# Altium PCB power.PcbDoc
Units mm, origin at the board's own origin, x right, y up, seen from the top; angles counter-clockwise.
Board outline 1081.53 x 626.49 mm, 2 copper layers (Top Layer, Bottom Layer); 53 components, 47 nets, 167 pads, 22 vias.
Unrouted connection lines stored in the file: 13.
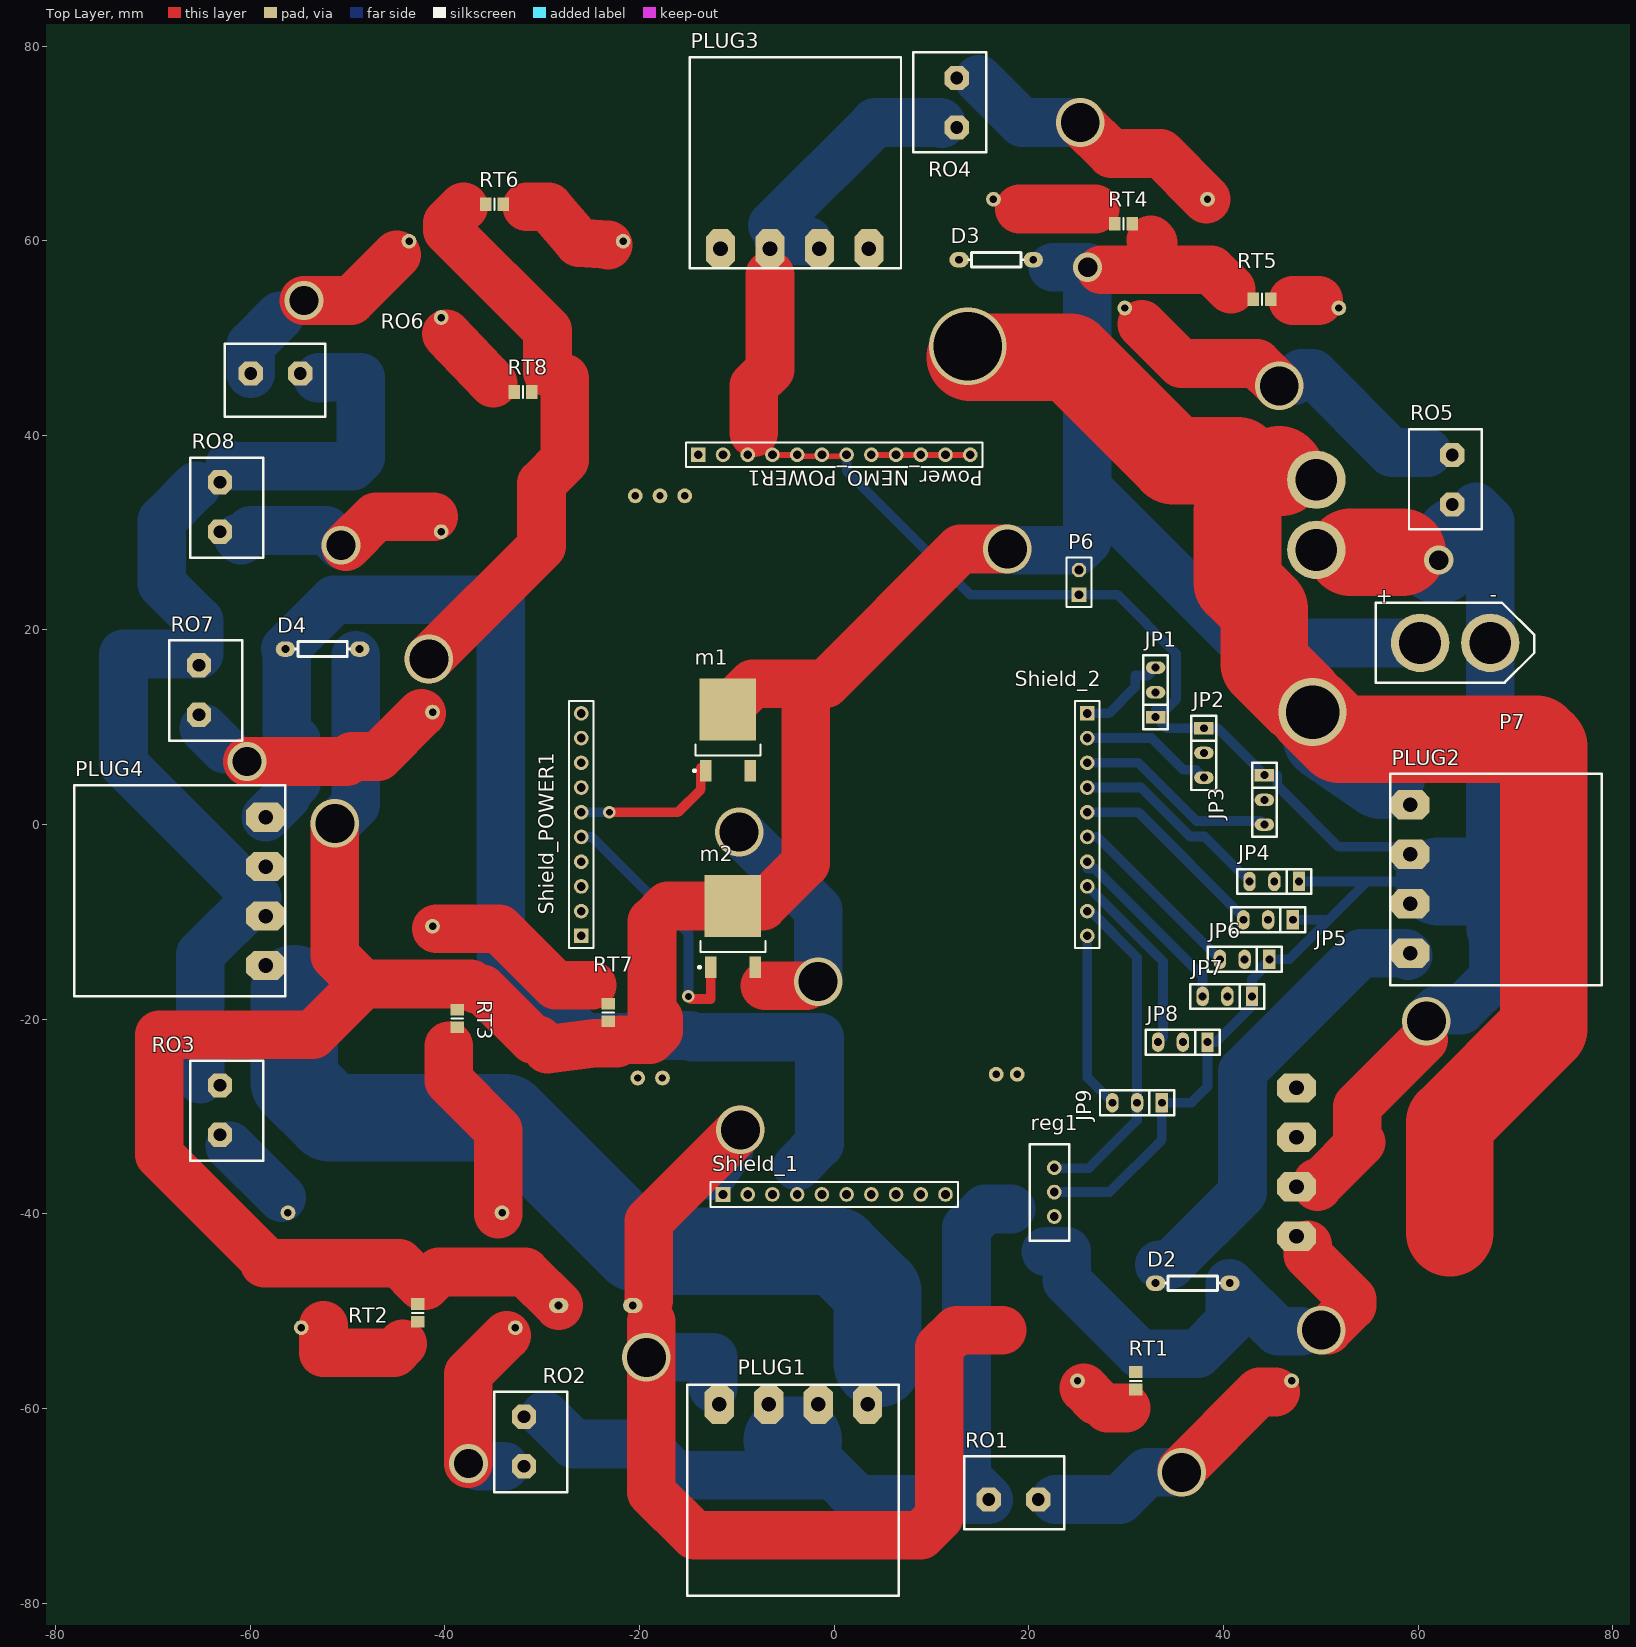
[diagram p0: Top Layer view]
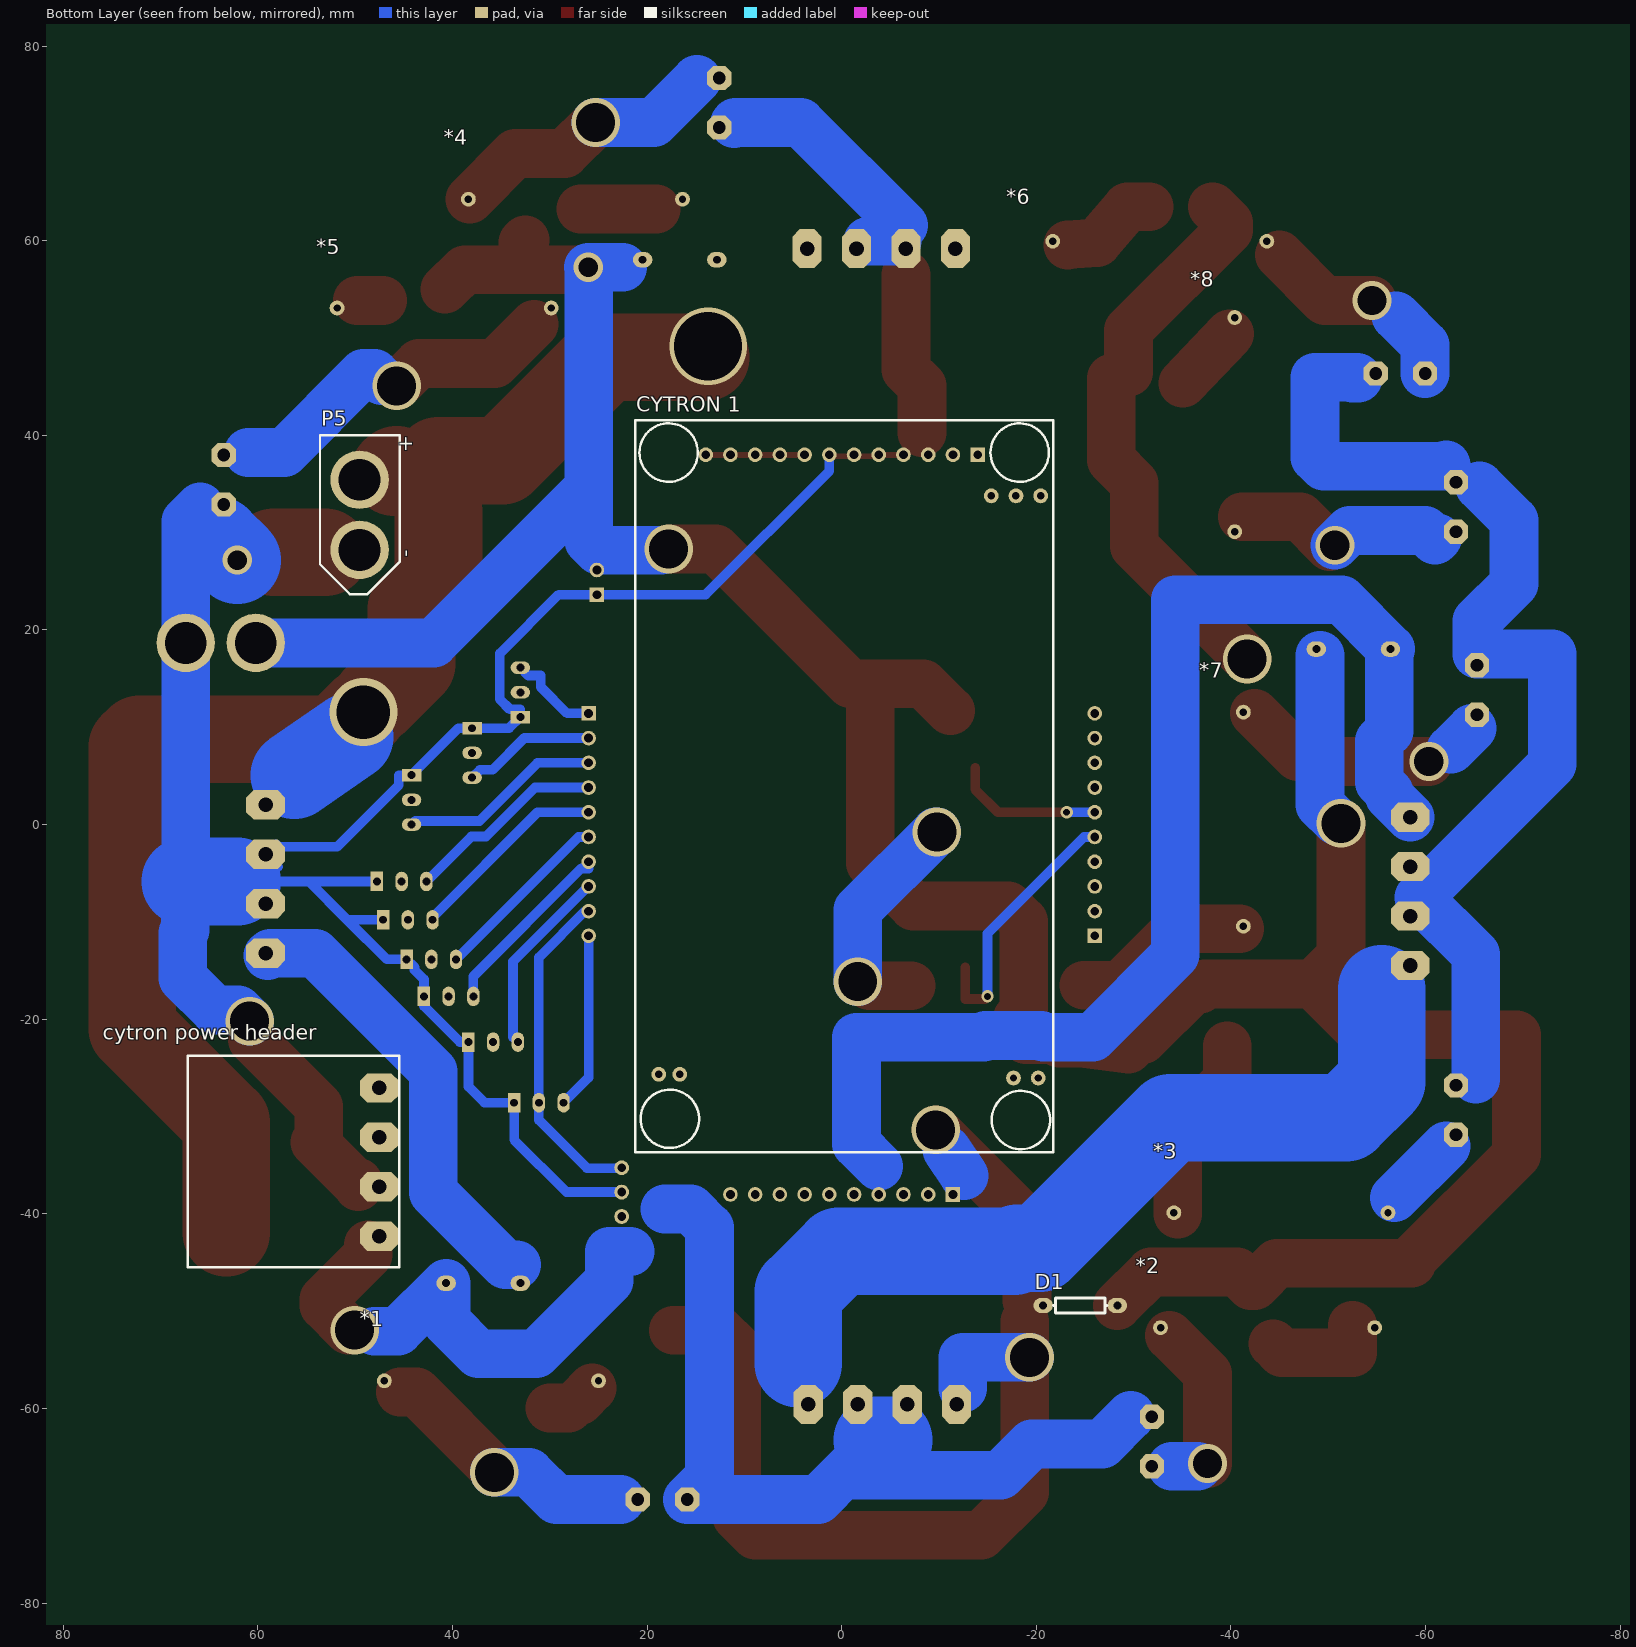
[diagram p1: Bottom Layer view, seen from below]

## Layer stack, top to bottom
Top Solder: solder mask 0.0102, Solder Resist, Dk 3.5
Top Layer: signal copper 0.0356
Dielectric 1: dielectric 0.32, FR-4, Dk 4.8
Bottom Layer: signal copper 0.0356
Bottom Solder: solder mask 0.0102, Solder Resist, Dk 3.5

## Board outline
526.415,336.042 524.129,338.328 -549.91,338.328 -549.91,-288.163 -546.862,-285.115 531.622,-285.115

## Design rules (kind name [scope] priority, off if disabled: settings)
Clearance [All] p1: gap=0.6 ignorepadtopadclearanceinfootprint=TRUE
PolygonConnect [All] p1: connectstyle=Relief reliefconductorwidth=0.254 reliefentries=4 polygonreliefangle="90 Angle" airgapwidth=0.254
RoutingVias [All] p1: holewidth=0.711 width=1.27 viastyle="Through Hole" minholewidth=0.711 minwidth=1.27 maxholewidth=0.711 maxwidth=1.27
SolderMaskExpansion [All] p1: expansion=0.102
Width [All] p1: maxlimit=9 minlimit=0.5 preferedwidth=0.6
30 further rules are at their usual default settings.

## Components (designator, comment, footprint, x,y, rotation, side; value= is the part's Value field where it differs from the comment)
*1 "fuse holder" "fuse Holder" 27.178,-60.452 r180 bottom
*2 "fuse holder" "fuse Holder" -52.578,-54.991 r180 bottom
*3 "fuse holder" "fuse Holder" -36.322,-36.576 r0 bottom
*4 "fuse holder" "fuse Holder" 18.542,60.96 r180 bottom
*5 "fuse holder" "fuse Holder" 49.657,56.388 r0 bottom
*6 "fuse holder" "fuse Holder" -23.876,63.246 r0 bottom
*7 "fuse holder" "fuse Holder" -37.973,-8.255 r270 bottom
*8 "fuse holder" "fuse Holder" -43.688,49.911 r90 bottom
"CYTRON 1" "cytron in/out 1CH" "cytron in/out 1CH" 0.889,-30.734 r90 bottom
"cytron power header" "Rossetta 4-pin" "Rossetta 4-pin plugable" 47.498,-34.671 r90 bottom
D1 "DIODE" AXIAL0.3 -20.701,-49.403 r180 bottom
D2 "DIODE" AXIAL0.3 33.02,-47.117 r0 top
D3 "DIODE" AXIAL0.3 12.827,58.039 r0 top
D4 "DIODE" AXIAL0.3 -56.388,18.034 r0 top
JP1 "HEADER 3" SIP3 33.02,11.049 r90 top
JP2 "HEADER 3" SIP3 37.973,9.906 r270 top
JP3 "HEADER 3" SIP3 44.196,5.08 r270 top
JP4 "HEADER 3" SIP3 47.752,-5.842 r180 top
JP5 "HEADER 3" SIP3 47.117,-9.779 r180 top
JP6 "HEADER 3" SIP3 44.704,-13.843 r180 top
JP7 "HEADER 3" SIP3 42.926,-17.653 r180 top
JP8 "HEADER 3" SIP3 38.354,-22.352 r180 top
JP9 "cytron signal header" SIP3 33.655,-28.575 r180 top
m1 "MOSFET" TO252 -10.922,8.636 r90 top
m2 "MOSFET" TO252 -10.414,-11.557 r90 top
P5 "48v-30A" XT-60 49.53,35.433 r270 bottom
P6 "Header 2" HDR1X2 25.146,23.622 r90 top
P7 "XT-60" XT-60 60.198,18.669 r0 top
PLUG1 "Rossetta 4-pin" "Rossetta 4-pin plugable" -4.191,-59.563 r180 top
PLUG2 "Rossetta 4-pin" "Rossetta 4-pin plugable" 59.182,-5.588 r270 top
PLUG3 "Rossetta 4-pin" "Rossetta 4-pin plugable" -4.064,59.182 r0 top
PLUG4 "Rossetta 4-pin" "Rossetta 4-pin plugable" -58.42,-6.858 r90 top
Power_NEMO_POWER1 "Header 12" HDR1X12 -13.97,38 r0 top
reg1 "7805" 7805 22.606,-37.759 r180 top
RO1 "Rossetta" "Rossetta 2-pin" 20.955,-69.342 r0 top
RO2 "Rossetta" "Rossetta 2-pin" -31.877,-65.913 r270 top
RO3 "Rossetta" "Rossetta 2-pin" -63.119,-31.877 r270 top
RO4 "Rossetta" "Rossetta 2-pin" 12.573,76.708 r90 top
RO5 "Rossetta" "Rossetta 2-pin" 63.5,37.973 r90 top
RO6 "Rossetta" "Rossetta 2-pin" -59.944,46.355 r180 top
RO7 "Rossetta" "Rossetta 2-pin" -65.278,11.303 r270 top
RO8 "Rossetta" "Rossetta 2-pin" -63.119,30.099 r270 top
RT1 "Res Thermal" 6-0805_N 30.988,-57.15 r90 top
RT2 "Res Thermal" 6-0805_N -42.799,-50.165 r90 top
RT3 "Res Thermal" 6-0805_N -38.735,-19.928 r90 top
RT4 "Res Thermal" 6-0805_N 29.707,61.722 r0 top
RT5 "Res Thermal" 6-0805_N 43.953,53.975 r180 top
RT6 "Res Thermal" 6-0805_N -34.914,63.754 r180 top
RT7 "Res Thermal" 6-0805_N -23.241,-19.304 r270 top
RT8 "Res Thermal" 6-0805_N -31.993,44.45 r0 top
Shield_1 "Sensors_camera" HDR1X10 -11.43,-38 r0 top
Shield_2 "Header 10" HDR1X10 26,11.43 r270 top
Shield_POWER1 "Header 10" HDR1X10 -26,-11.43 r90 top

## Footprints (in the part's own frame and the unit in brackets; to place one, negate y for a bottom-side part, rotate by r counter-clockwise, add the part's x,y. Pads: shape width x height; smd on the part's side, far side on the other; paste and mask are expansions set on the pad)
6-0805_N [mm] "Chip Resistor, Body 2.0x1.2mm, IPC Medium Density"
  rect 1.2x1.4 smd: 1(-0.9,0) 2(0.9,0)
  silkscreen extent 0,-0.6 0,0.6, body extent -1.07,-0.7 1.07,0.7, height 0.7
7805 [mil]
  round 60 hole 35.43: 1(0,98.43) 2(0,0) 3(0,-98.43)
  silkscreen extent -60,-193 100,197, body extent -60,-200 105,200, height 802
AXIAL0.3 [mil]
  oval 78.74x62 hole 32: 1(0,0) 2(300,0)
  silkscreen extent 41,-30 259,30
"cytron in/out 1CH" [mil]
  round 60 hole 30: 1(185,-830) 2(185,-730) 3(200,620) 4(200,705) 5(2540,-640) 6(2540,-740) 7(2540,-840)
  silkscreen extent -115,-890 2845,800
"fuse Holder" [mil]
  round 60 hole 30: 1(86.14,130) 2(-780,130)
  body extent -890,-58 180,320, height 514
HDR1X2 [mm] "Connector; Header; 2 Position"
  rect 1.5x1.5 hole 0.9: 1(0,0)
  round 1.5 hole 0.9: 2(2.54,0)
  silkscreen extent -1.27,-1.27 3.81,1.27
HDR1X10 [mm] "Connector; Header; 10 Position"
  rect 1.5x1.5 hole 0.9: 1(0,0)
  round 1.5 hole 0.9: 2(2.54,0) 3(5.08,0) 4(7.62,0) 5(10.16,0) 6(12.7,0) 7(15.24,0) 8(17.78,0) 9(20.32,0) 10(22.86,0)
  silkscreen extent -1.27,-1.27 24.13,1.27
HDR1X12 [mm] "Connector; Header; 12 Position"
  rect 1.5x1.5 hole 0.9: 1(0,0)
  round 1.5 hole 0.9: 2(2.54,0) 3(5.08,0) 4(7.62,0) 5(10.16,0) 6(12.7,0) 7(15.24,0) 8(17.78,0) 9(20.32,0) 10(22.86,0) 11(25.4,0) 12(27.94,0)
  silkscreen extent -1.27,-1.27 29.21,1.27
"Rossetta 2-pin" [mm]
  oct 2.5x2.5 hole 1.3: 1(0,0) 2(-5.08,0)
  silkscreen extent -7.62,-3.05 2.67,4.44, body extent -7.62,-3.17 2.54,4.33, height 10
"Rossetta 4-pin plugable" [mm]
  oct 3x4 hole 1.5: 1(-7.62,0) 2(-2.54,0) 3(2.54,0) 4(7.62,0)
  silkscreen extent -10.79,-2.03 10.92,19.68, body extent -10.85,-1.85 10.79,19.65, height 16
SIP3 [mm]
  rect 1.27x2 hole 0.813: 1(0,0)
  oval 1.27x2 hole 0.813: 2(2.54,0) 3(5.08,0)
  silkscreen extent -1.27,-1.27 6.35,1.27
TO252 [mm] "TO, 3-Pads, Body 6.30x6.69mm (max), IPC Medium Density"
  rect 6.4x5.8 smd: D(3.2,0)
  rect 2.2x1.2 smd: G(-3.1,2.28) S(-3.1,-2.28)
  silkscreen extent -3.22,-3.35 -0.4,3.55, body extent -3.81,-3.37 6.29,3.37, height 2.37
XT-60 [mm]
  round 6 hole 4.3: +(0,0) -(7.2,0)
  silkscreen extent -4.56,-4.07 11.74,4.14, body extent -4.56,-4.07 11.74,4.13, height 16.4

## Part data
D1 D2 D3 D4: "Diode"
JP9: library part "HEADER 3"
m1 m2: library part "MOSFET   AP9997AGH", datasheet=http://pdf.tixer.ru/115463.pdf, STORE=https://semtronics.net/shop/index.php?rt=product/product&path=84_85_127_129&product_id=579
P5: library part XT-60, "XT-60 Connector"
P6: "Header, 2-Pin", LatestRevisionDate=17-Jul-2002, LatestRevisionNote="Re-released for DXP Platform.", Publisher="Altium Limited"
P7: "XT-60 Connector"
Power_NEMO_POWER1: "Header, 12-Pin", LatestRevisionDate=17-Jul-2002, LatestRevisionNote="Re-released for DXP Platform.", Publisher="Altium Limited"
RT1 RT2 RT3 RT4 RT5 RT6 RT7 RT8: "Thermistor", Code_IPC=RESC2012, LatestRevisionDate=29-May-2009, LatestRevisionNote="IPC-7351 Footprint Added.", PackageDescription="Chip Resistor 0805 Case Size", PackageReference=6-0805, PackageVersion=Mar-2003, Published=24-Mar-1999, Publisher="Altium Limited"
Shield_1: library part "Header 10", "Header, 10-Pin", LatestRevisionDate=17-Jul-2002, LatestRevisionNote="Re-released for DXP Platform.", Publisher="Altium Limited"
Shield_2 Shield_POWER1: "Header, 10-Pin", LatestRevisionDate=17-Jul-2002, LatestRevisionNote="Re-released for DXP Platform.", Publisher="Altium Limited"
"cytron power header" PLUG1 PLUG2 PLUG3 PLUG4: Created By=NourAldin

## Via types
v1: diameter 5, hole 4, Top Layer to Bottom Layer, 12 vias
v2: diameter 4, hole 3, Top Layer to Bottom Layer, 4 vias
v3: diameter 3, hole 2, Top Layer to Bottom Layer, 2 vias
v4: diameter 1.27, hole 0.711, Top Layer to Bottom Layer, 2 vias
v5: diameter 7, hole 5.5, Top Layer to Bottom Layer, 1 vias
v6: diameter 8, hole 7, Top Layer to Bottom Layer, 1 vias

## Nets (pads, with @x,y where several pads share a name; then routed paths per layer and width w, separated by ;. In a path a pad name is that pad's centre, name@x,y a point inside that pad or via, vN(x,y) a via of type N, cw(c..) or ccw(c..) an arc to the next point about the centre after c; other vN are vias at no path point)
5v: JP9.2 reg1.3 Shield_2.9 | length 34
  Bottom Layer w1: reg1.3@22.987,-35.306 26.162,-35.306 31.115,-30.353 JP9.2 31.115,-13.651 26.354,-8.89 Shield_2.9
12v: "cytron power header.1" D1.2 D2.2 D3.2 D4.2 m1.D m2.D P6.2 P7.+ reg1.1 RT1.2 RT2.2 RT3.2 RT4.2 RT5.2 RT6.2 RT7.2 RT8.2 | length 442.9
  Top Layer w5: -58.547,-45.085 -44.698,-45.085 -42.418,-47.365 -42.037,-47.365 -40.646,-45.974 -31.75,-45.974 D1.2 ; -58.292,-44.959 -69.342,-33.909 -69.342,-21.59 -53.594,-21.59 -48.387,-16.383 ; v1(-51.308,0.127) -51.308,-13.462 -48.387,-16.383 ; v1(-41.656,17.018) -30.077,28.597 -30.077,35.074 -27.686,37.465 -27.686,45.847 ; -38.1,63.5 -39.751,61.849 -39.751,61.087 -29.464,50.8 -29.464,46.482 ; m1.D@-11.176,11.684 -8.382,14.478 -2.921,14.478 ; v1(17.78,28.321) 12.954,28.321 -0.889,14.478 -2.921,14.478 ; v3@27.432,57.023 32.507,57.023 ; 32.507,60.071 32.766,59.812 32.766,57.023 38.735,57.023 40.767,54.991 ; 48.641,-43.18 48.641,-44.196 53.213,-48.768 53.213,-49.403 v1@50.673,-51.943 ; -48.387,-16.383 -37.338,-16.383 -36.83,-16.891 -36.159,-16.891 -30.94,-22.11 -30.416,-22.11 -29.461,-23.065 -24.638,-22.479 -22.346,-22.479 -21.971,-22.104 -18.929,-22.104 -18.034,-21.209 -18.034,-19.887 -18.721,-19.2 -18.721,-9.958 -17.12,-8.357 m2.D -7.341,-8.357 -2.921,-3.937 -2.921,14.478
  Bottom Layer w5: v1@-50.8,0.381 -49.149,2.032 D4.2@-49.149,17.399 ; v1@18.542,28.194 25.019,28.194 25.983,29.158 25.983,34.596 ; 21.723,-43.859 23.876,-43.859 23.876,-46.863 31.369,-54.356 37.338,-54.356 40.64,-51.054 D2.2 45.593,-52.07 v1@48.006,-52.07 ; 22.479,57.277 v3(26.035,57.277) 25.983,57.225 25.983,34.596 ; P7.+ 41.91,18.669 25.983,34.596
  other v1: 50.038,-51.943
12Volt: Power_NEMO_POWER1.8 Power_NEMO_POWER1.9 Power_NEMO_POWER1.10 Power_NEMO_POWER1.11 Power_NEMO_POWER1.12 | length 10.1
  Top Layer w0.6: Power_NEMO_POWER1.8@4.064,37.973 Power_NEMO_POWER1.9@6.577,37.973 ; Power_NEMO_POWER1.9@6.477,37.973 Power_NEMO_POWER1.10@8.99,37.973 ; Power_NEMO_POWER1.10@8.89,37.973 Power_NEMO_POWER1.11@11.403,37.973 ; Power_NEMO_POWER1.11@11.684,37.973 Power_NEMO_POWER1.12@14.197,37.973
48v: P5.+ PLUG1.1 PLUG2.1 PLUG3.1 PLUG4.1 | length 225.9
  Top Layer w9: v6@13.97,48.006 24.257,48.006 34.86,37.403 41.43,37.403 ; 41.43,32.159 41.43,24.878 44.196,22.112 44.196,16.51 v5@47.816,12.89 ; 45.72,36.449 45.942,36.227 ; v5(49.149,11.557) 51.943,8.763 72.136,8.763 72.898,8.001 72.898,-20.955 63.246,-30.607 63.246,-41.91
  Bottom Layer w9: -55.499,-16.891 -55.499,-26.416 -51.816,-30.099 -33.782,-30.099 -20.365,-43.516 -18.05,-43.516 -17.715,-43.85 0.289,-43.85 4.445,-48.006 4.445,-55.372 ; v5@50.546,9.017 56.261,5.08
  other v6: 13.716,49.149
BUCK_1: D1.1 PLUG1.4 Shield_1.1 | length 109
  Top Layer w5: -19.05,-48.895 -19.05,-40.767 v1(-9.652,-31.369) ; -18.796,-51.054 -18.796,-68.58 -14.351,-73.025 8.89,-73.025 10.795,-71.12 10.795,-53.721 12.573,-51.943 17.272,-51.943
  Bottom Layer w5: v1(-19.304,-54.737) -12.446,-54.737 PLUG1.4@-12.446,-57.912 ; -12.573,-36.068 v1@-10.795,-33.401
BUCK_2: D2.1 PLUG2.4 Shield_1.2 | length 46.2
  Bottom Layer w5: 33.401,-45.212 34.544,-45.212 41.954,-37.802 41.954,-25.356 54.102,-13.208 58.721,-13.208 PLUG2.4@58.955,-13.442
BUCK_3: D3.1 PLUG3.4 Shield_1.3
BUCK_4: D4.1 PLUG4.4 Shield_1.4 | length 129.4
  Bottom Layer w5: PLUG4.4 -56.261,2.921 -56.261,3.329 -55.225,4.365 -55.225,8.589 -56.261,9.625 -56.261,17.145 ; D4.1 -56.388,18.08 -51.366,23.102 -34.278,23.102 -34.278,-13.347 -25.781,-21.844 -20.702,-21.844 -20.523,-21.665 -14.783,-21.665 -14.604,-21.844 -1.524,-21.844 -1.524,-32.809 -3.81,-35.095
DC+: "cytron power header.3"
DC-: "cytron power header.4"
DC_Direction: JP9.3 Shield_2.10 | length 18.2
  Bottom Layer w1: Shield_2.10 26,-26 JP9.3
Eather1: Shield_POWER1.10
Eather2: Shield_POWER1.9
Eather3: Shield_POWER1.8
Eather4: Shield_POWER1.7
GND: "cytron power header.2" JP1.1 JP2.1 JP3.1 JP4.1 JP5.1 JP6.1 JP7.1 JP8.1 JP9.1 m1.S m2.S P5.- P6.1 P7.- PLUG1.2 PLUG1.3 PLUG2.2 PLUG2.3 PLUG3.2 PLUG3.3 PLUG4.2 PLUG4.3 Power_NEMO_POWER1.3 Power_NEMO_POWER1.4 Power_NEMO_POWER1.5 Power_NEMO_POWER1.6 Power_NEMO_POWER1.7 reg1.2 RO1.2 RO2.2 RO3.2 RO4.2 RO5.2 RO6.2 RO7.2 RO8.2 | length 516.5
  Top Layer w0.6: Power_NEMO_POWER1.4@-6.477,37.973 Power_NEMO_POWER1.5@-3.964,37.973 ; Power_NEMO_POWER1.5@-3.937,37.846 -1.424,37.846 Power_NEMO_POWER1.6 ; Power_NEMO_POWER1.6@-1.016,37.846 Power_NEMO_POWER1.7@0.762,37.846
  Top Layer w5: -8.255,40.259 -8.255,45.085 -6.604,46.736 -6.604,56.515 ; -7.118,-16.562 v1@-2.846,-16.562 ; 49.657,-37.211 49.657,-36.731 50.032,-36.731 54.124,-32.639 53.721,-32.639 53.721,-28.956 v1@60.579,-22.098
  Top Layer w9: 53.086,27.979 58.332,27.979
  Bottom Layer w1: Power_NEMO_POWER1.7 1.27,36.322 13.97,23.622 P6.1 29.083,23.622 35.12,17.585 35.12,12.87 34.104,11.854 33.02,11.854 JP1.1 34.163,9.906 JP2.1 39.37,9.906 JP3.1 45.516,5.08 45.516,4.039 51.833,-2.279 57.87,-2.279 58.141,-2.007 PLUG2.2 PLUG2.2@57.912,-4.318 ; reg1.2 28.281,-37.759 33.655,-32.385 JP9.1 36.703,-28.575 38.354,-26.924 JP8.1 39.232,-22.352 42.926,-18.658 JP7.1 42.926,-15.9 43.899,-14.927 43.899,-14.648 JP6.1 46.736,-13.843 50.8,-9.779 ; JP5.1 50.8,-9.779 ; JP4.1 54.737,-5.842 ; 62.103,-5.842 54.737,-5.842 ; 50.8,-9.779 54.737,-5.842
  Bottom Layer w5: -65.532,34.798 -69.088,31.242 -69.088,24.765 -65.278,20.955 -65.278,17.526 -73.025,17.526 -73.025,6.223 -59.309,-7.493 -65.151,-13.335 -65.151,-26.162 ; -62.103,36.957 -61.976,36.83 -49.53,36.83 -48.641,37.719 -48.641,45.974 -52.959,45.974 -53.086,45.847 -52.451,45.847 ; -29.718,-60.706 -26.785,-63.639 -19.546,-63.639 -16.319,-66.865 -0.064,-66.865 ; v1(-9.779,-0.762) -9.652,-0.762 -1.651,-8.763 v1(-1.651,-16.129) ; -6.35,61.595 4.191,72.136 10.922,72.136 11.049,72.009 ; PLUG3.2@-5.715,59.944 PLUG3.3@-2.667,59.944 ; -3.683,-63.246 -0.064,-66.865 ; 18.161,-39.497 15.494,-39.497 13.589,-41.402 13.589,-67.056 RO1.2 2.413,-69.342 -0.064,-66.865 ; v1(60.833,-20.193) 61.984,-19.042 64.423,-19.042 67.703,-15.762 67.703,-11.122 67.437,-10.856 67.437,-5.842 67.398,-5.803 P7.- 67.398,31.154 65.913,32.639
  Bottom Layer w9: -4.826,-63.246 -3.683,-63.246 ; 62.103,-5.842 67.437,-5.842 ; v3(62.103,27.178) 64.135,29.21
Light_1: m1.G Shield_POWER1.6 | length 15.3
  Top Layer w1: v4@-22.86,1.27 -16.071,1.27 -13.716,3.625 m1.G@-13.716,5.842
  Bottom Layer w1: Shield_POWER1.6 -25.873,1.397 -25.746,1.27 v4(-23.114,1.27)
Light_2: m2.G Shield_POWER1.5 | length 27.3
  Top Layer w1: Shield_POWER1.5 Shield_POWER1.5@-25.924,-1.27 ; v4(-14.986,-17.653) -14.726,-17.913 -12.694,-17.913 m2.G
  Bottom Layer w1: Shield_POWER1.5 -24.892,-1.27 -14.986,-11.176 v4(-14.986,-17.653)
Light_Micro: Shield_POWER1.4
Motor_PWM_1: JP1.3 Shield_2.1 | length 9.7
  Bottom Layer w1: Shield_2.1 28.207,11.43 30.92,14.143 30.92,15.324 32.215,15.324 JP1.3
Motor_PWM_2: JP2.3 Shield_2.2 | length 13.7
  Bottom Layer w1: Shield_2.2 32.614,8.89 35.873,5.631 37.168,5.631 JP2.3
Motor_PWM_3: JP3.3 Shield_2.3 | length 20.8
  Bottom Layer w1: Shield_2.3 31.242,6.35 37.211,0.381 43.815,0.381 JP3.3
Motor_PWM_4: JP4.3 Shield_2.4 | length 20.7
  Bottom Layer w1: Shield_2.4 31.519,3.81 36.548,-1.219 38.049,-1.219 JP4.3
Motor_PWM_5: JP5.3 Shield_2.5 | length 20.8
  Bottom Layer w1: Shield_2.5 31.242,1.27 42.037,-9.525 JP5.3
Motor_PWM_6: JP6.3 Shield_2.6 | length 18.8
  Bottom Layer w1: Shield_2.6 27.051,-1.27 JP6.3
Motor_PWM_7: JP7.3 Shield_2.7 | length 19.2
  Bottom Layer w1: Shield_2.7 26,-4.5 26.766,-4.5 37.846,-15.58 JP7.3
Motor_PWM_8: JP8.3 Shield_2.8 | length 19.5
  Bottom Layer w1: Shield_2.8 26.076,-6.35 33.782,-14.056 33.782,-21.844 JP8.3
Net*1_1: *1.1 RT1.1 | length 3.7
  Top Layer w5: 25.625,-57.883 26.924,-59.182 ; 28.067,-59.944 29.972,-59.944
Net*1_2: *1.2 RO1.1 | length 27.3
  Top Layer w5: v1(35.687,-66.548) 35.687,-66.294 43.688,-58.293 45.339,-58.293
  Bottom Layer w5: 22.733,-69.342 29.337,-69.342 32.131,-66.548 v1(35.687,-66.548)
Net*2_1: *2.1 RT2.1 | length 11.4
  Top Layer w5: -52.48,-51.435 -52.48,-54.252 -45.235,-54.252 -44.323,-53.34
Net*2_2: *2.2 RO2.1 | length 17.5
  Top Layer w5: v2(-37.592,-65.659) -37.592,-56.422 -33.655,-52.485
  Bottom Layer w5: v2@-36.576,-65.913 -33.909,-65.913
Net*3_1: *3.1 RT3.1 | length 19.4
  Top Layer w5: -39.624,-22.733 -39.624,-26.289 -34.515,-31.398 *3.1@-34.515,-40.005
Net*3_2: *3.2 RO3.1 | length 7.5
  Bottom Layer w5: -62.103,-33.02 -56.769,-38.354
Net*4_1: *4.1 RT4.1 | length 7.8
  Top Layer w5: 19.039,63.257 26.797,63.257
Net*4_2: *4.2 RO4.1 | length 28.5
  Top Layer w5: v1(25.273,72.136) 28.448,68.961 33.528,68.961 *4.2@38.227,64.262
  Bottom Layer w5: 14.859,76.581 19.304,72.136 v1(25.273,72.136)
Net*5_1: *5.1 RT5.1 | length 2.6
  Top Layer w5: 47.139,53.848 49.784,53.848
Net*5_2: *5.2 RO5.1 | length 34.1
  Top Layer w5: 31.6,51.412 35.64,47.371 43.434,47.371 v1(45.72,45.085)
  Bottom Layer w5: v1@47.244,45.593 48.006,46.355 49.149,46.355 57.277,38.227 60.96,38.227
Net*6_1: *6.1 RT6.1 | length 10.1
  Top Layer w5: -31.594,63.471 -29.366,63.471 -26.23,59.799 -23.241,59.563
Net*6_2: *6.2 RO6.1 | length 18.6
  Top Layer w5: v2(-54.483,53.848) -49.657,53.848 -44.958,58.547
  Bottom Layer w5: RO6.1 -59.944,49.276 -56.959,52.261
Net*7_1: *7.1 RT7.1 | length 18.4
  Top Layer w5: *7.1@-40.894,-10.697 -34.433,-10.697 -28.62,-16.51 -24.892,-16.51
Net*7_2: *7.2 RO7.1 | length 23
  Top Layer w5: v2(-60.325,6.477) -50.084,6.477 -49.564,6.997 -46.851,6.997 -42.418,11.43
  Bottom Layer w5: -64.77,9.906 -62.611,7.747
Net*8_1: *8.1 RT8.1 | length 7
  Top Layer w5: -39.878,50.419 -35.052,45.339
Net*8_2: *8.2 RO8.1 | length 22
  Top Layer w5: v2@-50.165,28.575 -47.117,31.623 -41.148,31.623
  Bottom Layer w5: -61.214,29.464 -60.96,29.21 -59.944,30.226 -52.197,30.226 v2(-50.673,28.702)
Pilge_Digital: Shield_POWER1.3
Pilge_PWM: Shield_POWER1.2
Signal_micro_1: Shield_1.6
Signal_micro_2: Shield_1.5
pads on no net: "CYTRON 1.1" "CYTRON 1.2" "CYTRON 1.3" "CYTRON 1.4" "CYTRON 1.5" "CYTRON 1.6" "CYTRON 1.7" JP1.2 JP2.2 JP3.2 JP4.2 JP5.2 JP6.2 JP7.2 JP8.2 Power_NEMO_POWER1.1 Power_NEMO_POWER1.2 Shield_1.7 Shield_1.8 Shield_1.9 Shield_1.10 Shield_POWER1.1

## Silkscreen, mask and mechanical layers (free items; w line width, h text height)
Mechanical 13:
  lines w0.254: 80.01,0 cw(c0.01,0.04) 80.01,0.04

## Text inside footprints (layer, text, board x,y; h text height)
P5: Bottom Overlay "-" at 45.29,28.263 h1.52 r90; Bottom Overlay "+" at 45.4,39.983 h1.52 r90
P7: Top Overlay "-" at 67.368,22.909 h1.52; Top Overlay "+" at 55.648,22.799 h1.52